# Altium PCB Copy of pcb_solder.PcbDoc (part 2 of 2)
Units mil, origin at the board's own origin, x right, y up, seen from the top; angles counter-clockwise.
Board outline 15000 x 4842.5 mil, 2 copper layers (F.Cu, B.Cu); 212 components, 120 nets, 804 pads, 0 vias.
Unrouted connection lines stored in the file: 258.
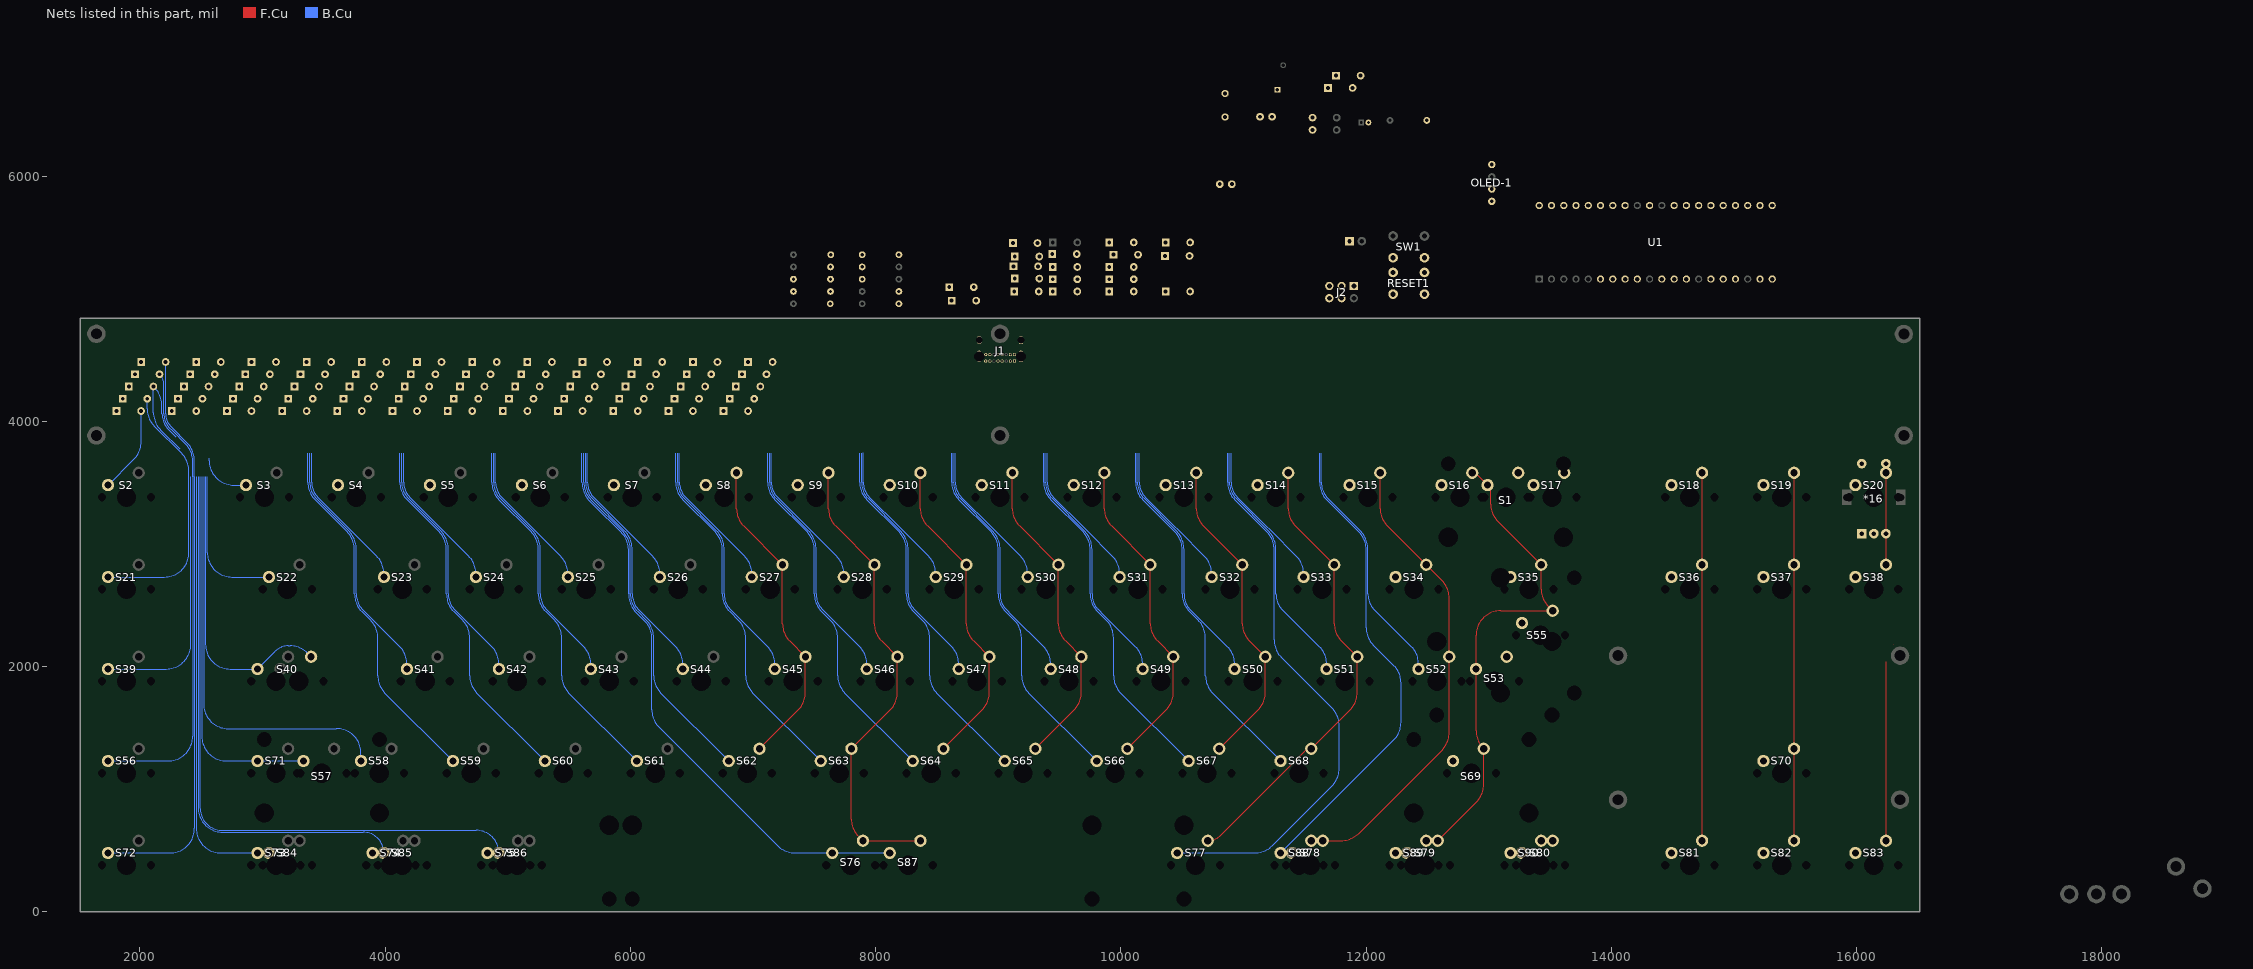
[diagram p2: the nets of this part, all layers, seen from the top]

## Nets (pads, with @x,y where several pads share a name; then routed paths per layer and width w, separated by ;. In a path a pad name is that pad's centre, name@x,y a point inside that pad or via, vN(x,y) a via of type N, cw(c..) or ccw(c..) an arc to the next point about the centre after c; other vN are vias at no path point) (continued)
COL6: S8.2 S27.2 S45.2 S62.2 U1.15 | length 2612.5
  F.Cu w10: S8.2@6865.25,3581 6865.25,3288.84 ccw(c7065.25,3288.84) 6923.83,3147.42 S27.2@7240.25,2831 7240.25,2351.34 ccw(c7440.25,2351.34) 7298.83,2209.92 S45.2@7427.75,2081 7427.75,1788.84 cw(c7227.75,1788.84) 7369.17,1647.42 S62.2@7052.75,1331
COL7: S9.2 S28.2 S46.2 S63.2 S76.2 S87.2 U1.19 | length 3861.5
  F.Cu w10: S9.2@7615.25,3581 7615.25,3288.84 ccw(c7815.25,3288.84) 7673.83,3147.42 S28.2@7990.25,2831 7990.25,2351.34 ccw(c8190.25,2351.34) 8048.83,2209.92 S46.2@8177.75,2081 8177.75,1788.84 cw(c7977.75,1788.84) 8119.17,1647.42 S63.2@7802.75,1331 7802.75,757.59 ccw(c8002.75,757.59) 7861.33,616.17 S76.2@7896.5,581 S87.2@8365.25,581
COL8: S10.2 S29.2 S47.2 S64.2 U1.20 | length 2612.5
  F.Cu w10: S10.2@8365.25,3581 8365.25,3288.84 ccw(c8565.25,3288.84) 8423.83,3147.42 S29.2@8740.25,2831 8740.25,2351.34 ccw(c8940.25,2351.34) 8798.83,2209.92 S47.2@8927.75,2081 8927.75,1788.84 cw(c8727.75,1788.84) 8869.17,1647.42 S64.2@8552.75,1331
COL9: S11.2 S30.2 S48.2 S65.2 U1.35 | length 2612.5
  F.Cu w10: S11.2@9115.25,3581 9115.25,3288.84 ccw(c9315.25,3288.84) 9173.83,3147.42 S30.2@9490.25,2831 9490.25,2351.34 ccw(c9690.25,2351.34) 9548.83,2209.92 S48.2@9677.75,2081 9677.75,1788.84 cw(c9477.75,1788.84) 9619.17,1647.42 S65.2@9302.75,1331
COL10: S12.2 S31.2 S49.2 S66.2 U1.34 | length 2612.5
  F.Cu w10: S12.2@9865.25,3581 9865.25,3288.84 ccw(c10065.25,3288.84) 9923.83,3147.42 S31.2@10240.25,2831 10240.25,2351.34 ccw(c10440.25,2351.34) 10298.83,2209.92 S49.2@10427.75,2081 10427.75,1788.84 cw(c10227.75,1788.84) 10369.17,1647.42 S66.2@10052.75,1331
COL11: S13.2 S32.2 S50.2 S67.2 U1.33 | length 2612.5
  F.Cu w10: S13.2@10615.25,3581 10615.25,3288.84 ccw(c10815.25,3288.84) 10673.83,3147.42 S32.2@10990.25,2831 10990.25,2351.34 ccw(c11190.25,2351.34) 11048.83,2209.92 S50.2@11177.75,2081 11177.75,1788.84 cw(c10977.75,1788.84) 11119.17,1647.42 S67.2@10802.75,1331
COL12: S14.2 S33.2 S51.2 S68.2 S77.2 U1.29 | length 3757.2
  F.Cu w10: S77.2@10709,581 ccw(c10709,733.1) 10816.55,625.55 11500.26,1309.26 cw(c11552.75,1256.76) S68.2@11552.75,1331 11869.17,1647.42 ccw(c11727.75,1788.84) 11927.75,1788.84 S51.2@11927.75,2081 11798.83,2209.92 cw(c11940.25,2351.34) 11740.25,2351.34 S33.2@11740.25,2831 11423.83,3147.42 cw(c11565.25,3288.84) 11365.25,3288.84 S14.2@11365.25,3581
COL13: S15.2 S34.2 S52.2 S78.2 S88.2 U1.28 | length 3856.3
  F.Cu w10: S88.2@11552.75,581 S78.2@11646.5,581 11797.16,581 ccw(c11797.16,781) 11938.58,639.58 12619.17,1320.17 ccw(c12477.75,1461.59) 12677.75,1461.59 S52.2@12677.75,2081 12677.75,2560.66 ccw(c12477.75,2560.66) 12619.17,2702.08 S34.2@12490.25,2831 12173.83,3147.42 cw(c12315.25,3288.84) 12115.25,3288.84 S15.2@12115.25,3581
COL14: S1.2 S16.2 S35.2 S53.2 S55.2 S69.2 S79.2 S89.2 U1.27 | length 3968
  F.Cu w10: S79.2@12584,581 12900.42,897.42 ccw(c12759,1038.84) 12959,1038.84 S69.2@12959,1331 12955.08,1334.92 cw(c13096.5,1476.34) 12896.5,1476.34 S53.2@12896.5,1981 12896.5,2256 cw(c13096.5,2256) 13096.5,2456 S55.2@13521.5,2456 13486.33,2491.17 cw(c13627.75,2632.59) 13427.75,2632.59 S35.2@13427.75,2831 13074.58,3184.17 cw(c13216,3325.59) 13016,3325.59 13016,3438 ccw(c12974.35,3438) 13003.8,3467.45 S1.2@12990.25,3481 12907.93,3563.32 ccw(c12865.25,3520.64) S16.2@12865.25,3581
COL15: S17.2 S80.2 S90.2 U1.26
COL16: J2.1 S18.2 S36.2 S81.2 U1.7 | length 3000
  F.Cu w10: S81.2@14740.25,581 S36.2@14740.25,2831 S18.2@14740.25,3581
COL17: J2.4 S19.2 S37.2 S70.2 S82.2 U1.6 | length 3000
  F.Cu w10: S82.2@15490.25,581 S70.2@15490.25,1331 S37.2@15490.25,2831 S19.2@15490.25,3581
COL18: *16.S1 S20.2 S38.2 S83.2 U1.21 | length 2207.6
  F.Cu w10: S83.2@16240.25,581 16240.25,2038.41 ; S38.2@16240.25,2831 S20.2@16240.25,3581 ; 16298.83,2179.83 16299,2180
D+: J1.A6 J1.B6 R7.1 R7.2 U1.16 ZD2.1
D-: J1.A7 J1.B7 R5.2 R6.1 R6.2 U1.17 ZD1.1
ENCA: *16.A R10.2 U1.24
ENCB: *16.B R9.2 U1.25
ENCSW2: *16.S2 D19.2 S20.1
GND: *16.C C1.2 C2.2 C3.2 C4.2 C5.2 J1.1 J1.2 J1.3 J1.4 J1.A1 J1.A12 J1.B1 J1.B12 J2.6 OLED-1.4 R1.1 R4.2 R8.1 RESET1.2 SW1.2 U1.11 U1.31 ZD1.2 ZD2.2
i2c_SCL: OLED-1.2 R3.1 U1.22
i2c_SDA: OLED-1.1 R2.1 U1.23
NetC1_1: C1.1 U1.13 Y1.1
NetC2_1: C2.1 U1.12 Y1.2
NetD1_2: D1.2 S2.1 | length 707.1
  B.Cu w10: S2.1@1740.25,3481 1951.42,3692.17 ccw(c1810,3833.59) 2010,3833.59 D1.2@2010,4085
NetD2_2: D2.2 S3.1 | length 433.4
  B.Cu w10: 2565,3700 2565,3681 ccw(c2765,3681) 2765,3481 S3.1@2865.25,3481
NetD3_2: D3.2 S4.1
NetD4_2: D4.2 S5.1
NetD5_2: D5.2 S6.1
NetD6_2: D6.2 S7.1
NetD7_2: D7.2 S8.1
NetD8_2: D8.2 S9.1
NetD9_2: D9.2 S10.1
NetD10_2: D10.2 S11.1
NetD11_2: D11.2 S12.1
NetD12_2: D12.2 S13.1
NetD13_2: D13.2 S14.1
NetD14_2: D14.2 S15.1
NetD15_2: D15.2 S1.1 S16.1
NetD16_2: D16.2 S17.1
NetD17_2: D17.2 S18.1
NetD18_2: D18.2 S19.1
NetD20_2: D20.2 S21.1 | length 2151.5
  B.Cu w10: S21.1@1740.25,2731 2200,2731 ccw(c2200,2931) 2400,2931 2400,3597.16 ccw(c2200,3597.16) 2341.42,3738.58 2118.58,3961.42 cw(c2260,4102.84) 2060,4102.84 D20.2@2060,4185
NetD21_2: D21.2 S22.1 | length 1235.9
  B.Cu w10: 2550,3550 2550,2931 ccw(c2750,2931) 2750,2731 S22.1@3052.75,2731
NetD22_2: D22.2 S23.1 | length 1237.4
  B.Cu w10: 3400,3740 3400,3502.84 ccw(c3570,3502.84) 3449.83,3382.6 3687.21,3145.21 3712.58,3119.85 cw(c3550,2957.16) 3720.62,3111.39 ccw(c3728,3118.14) 3720.88,3111.12 3931.67,2900.33 cw(c3790.25,2758.91) 3990.25,2758.91 S23.1@3990.25,2731
NetD23_2: D23.2 S24.1 | length 1237.4
  B.Cu w10: 4150,3740 4150,3502.84 ccw(c4320,3502.84) 4199.83,3382.6 4437.21,3145.21 4462.58,3119.85 cw(c4300,2957.16) 4470.62,3111.39 ccw(c4478,3118.14) 4470.88,3111.12 4681.67,2900.33 cw(c4540.25,2758.91) 4740.25,2758.91 S24.1@4740.25,2731
NetD24_2: D24.2 S25.1 | length 1237.4
  B.Cu w10: 4900,3740 4900,3502.84 ccw(c5070,3502.84) 4949.83,3382.6 5187.21,3145.21 5212.58,3119.85 cw(c5050,2957.16) 5220.62,3111.39 ccw(c5228,3118.14) 5220.88,3111.12 5431.67,2900.33 cw(c5290.25,2758.91) 5490.25,2758.91 S25.1@5490.25,2731
NetD25_2: D25.2 S26.1 | length 1237.4
  B.Cu w10: 5650,3740 5650,3502.84 ccw(c5820,3502.84) 5699.83,3382.6 5937.21,3145.21 5962.58,3119.85 cw(c5800,2957.16) 5970.62,3111.39 ccw(c5978,3118.14) 5970.88,3111.12 6181.67,2900.33 cw(c6040.25,2758.91) 6240.25,2758.91 S26.1@6240.25,2731
NetD26_2: D26.2 S27.1 | length 1237.4
  B.Cu w10: 6400,3740 6400,3502.84 ccw(c6570,3502.84) 6449.83,3382.6 6687.21,3145.21 6712.58,3119.85 cw(c6550,2957.16) 6720.62,3111.39 ccw(c6728,3118.14) 6720.88,3111.12 6931.67,2900.33 cw(c6790.25,2758.91) 6990.25,2758.91 S27.1@6990.25,2731
NetD27_2: D27.2 S28.1 | length 1237.4
  B.Cu w10: 7150,3740 7150,3502.84 ccw(c7320,3502.84) 7199.83,3382.6 7437.21,3145.21 7462.58,3119.85 cw(c7300,2957.16) 7470.62,3111.39 ccw(c7478,3118.14) 7470.88,3111.12 7681.67,2900.33 cw(c7540.25,2758.91) 7740.25,2758.91 S28.1@7740.25,2731
NetD28_2: D28.2 S29.1 | length 1240.3
  B.Cu w10: 7900,3742.84 7900,3502.84 ccw(c8070,3502.84) 7949.83,3382.6 7949.89,3382.54 8187.21,3145.21 8212.58,3119.85 cw(c8050,2957.16) 8220.62,3111.39 ccw(c8228,3118.14) 8220.88,3111.12 8431.67,2900.33 cw(c8290.25,2758.91) 8490.25,2758.91 S29.1@8490.25,2731
NetD29_2: D29.2 S30.1 | length 1237.4
  B.Cu w10: 8650,3740 8650,3502.84 ccw(c8820,3502.84) 8699.83,3382.6 8937.21,3145.21 8962.58,3119.85 cw(c8800,2957.16) 8970.62,3111.39 ccw(c8978,3118.14) 8970.88,3111.12 9181.67,2900.33 cw(c9040.25,2758.91) 9240.25,2758.91 S30.1@9240.25,2731
NetD30_2: D30.2 S31.1 | length 1237.4
  B.Cu w10: 9400,3740 9400,3502.84 ccw(c9570,3502.84) 9449.83,3382.6 9687.21,3145.21 9712.58,3119.85 cw(c9550,2957.16) 9720.62,3111.39 ccw(c9728,3118.14) 9720.88,3111.12 9931.67,2900.33 cw(c9790.25,2758.91) 9990.25,2758.91 S31.1@9990.25,2731
NetD31_2: D31.2 S32.1 | length 1237.4
  B.Cu w10: 10150,3740 10150,3502.84 ccw(c10320,3502.84) 10199.83,3382.6 10437.21,3145.21 10462.58,3119.85 cw(c10300,2957.16) 10470.62,3111.39 ccw(c10478,3118.14) 10470.88,3111.12 10681.67,2900.33 cw(c10540.25,2758.91) 10740.25,2758.91 S32.1@10740.25,2731
NetD32_2: D32.2 S33.1 | length 1237.4
  B.Cu w10: 10900,3740 10900,3502.84 ccw(c11070,3502.84) 10949.83,3382.6 11187.21,3145.21 11212.58,3119.85 cw(c11050,2957.16) 11220.62,3111.39 ccw(c11228,3118.14) 11220.88,3111.12 11431.67,2900.33 cw(c11290.25,2758.91) 11490.25,2758.91 S33.1@11490.25,2731
NetD33_2: D33.2 S34.1
NetD34_2: D34.2 S35.1
NetD35_2: D35.2 S36.1
NetD36_2: D36.2 S37.1
NetD37_2: D37.2 S38.1
NetD38_2: D38.2 S39.1 | length 3212.1
  B.Cu w10: S39.1@1740.25,1981 2215,1981 ccw(c2215,2181) 2415,2181 2415,3550 ; 2291.29,3876.29 2247.77,3919.8 ccw(c2240.67,3912.77) 2247.69,3919.88 2233.85,3933.72 cw(c2363.64,4063.64) 2180,4063.64 2180,4074.74 cw(c2348.99,4075) 2180,4075 2180,4132.16 ccw(c1980,4132.16) 2121.42,4273.58 D38.2@2110,4285 2110,4072.84 ccw(c2310,4072.84) 2155.84,3945.42 ccw(c2163.5,3951.85) 2156.39,3944.82 2175.61,3925.61 2323.11,3778.11
NetD39_2: D39.2 S40.1 | length 2444.8
  B.Cu w10: 2535,3550 2535,2181 ccw(c2735,2181) 2735,1981 S40.1@2959,1981 3104.16,2126.16 cw(c3210,2020.32) 3210,2170 3224.66,2170 cw(c3224.66,1970) 3366.08,2111.42 S40.1@3396.5,2081
NetD40_2: D40.2 S41.1 | length 2053.8
  B.Cu w10: 3385,3740 3385,3502.84 ccw(c3570,3502.84) 3439.18,3372.03 3702.01,3109.2 cw(c3550,2957.16) 3733.8,3068.7 cw(c3550,2957.16) 3765,2957.16 3765,2592.84 ccw(c3950,2592.84) 3765.18,2584.63 ccw(c3950,2592.84) 3809.22,2472.82 ccw(c3816.79,2479.35) 3809.68,2472.32 3862,2420 4119.17,2162.83 cw(c3977.75,2021.41) 4177.75,2021.41 S41.1@4177.75,1981
NetD41_2: D41.2 S42.1 | length 2053.8
  B.Cu w10: 4135,3740 4135,3502.84 ccw(c4320,3502.84) 4189.18,3372.03 4452.01,3109.2 cw(c4300,2957.16) 4483.8,3068.7 cw(c4300,2957.16) 4515,2957.16 4515,2592.84 ccw(c4700,2592.84) 4515.18,2584.63 ccw(c4700,2592.84) 4559.22,2472.82 ccw(c4566.79,2479.35) 4559.68,2472.32 4612,2420 4869.17,2162.83 cw(c4727.75,2021.41) 4927.75,2021.41 S42.1@4927.75,1981
NetD42_2: D42.2 S43.1 | length 2053.8
  B.Cu w10: 4885,3740 4885,3502.84 ccw(c5070,3502.84) 4939.18,3372.03 5202.01,3109.2 cw(c5050,2957.16) 5233.8,3068.7 cw(c5050,2957.16) 5265,2957.16 5265,2592.84 ccw(c5450,2592.84) 5265.18,2584.63 ccw(c5450,2592.84) 5309.22,2472.82 ccw(c5316.79,2479.35) 5309.68,2472.32 5362,2420 5619.17,2162.83 cw(c5477.75,2021.41) 5677.75,2021.41 S43.1@5677.75,1981
NetD43_2: D43.2 S44.1 | length 2053.8
  B.Cu w10: 5635,3740 5635,3502.84 ccw(c5820,3502.84) 5689.18,3372.03 5952.01,3109.2 cw(c5800,2957.16) 5983.8,3068.7 cw(c5800,2957.16) 6015,2957.16 6015,2592.84 ccw(c6200,2592.84) 6015.18,2584.63 ccw(c6200,2592.84) 6059.22,2472.82 ccw(c6066.79,2479.35) 6059.68,2472.32 6112,2420 6369.17,2162.83 cw(c6227.75,2021.41) 6427.75,2021.41 S44.1@6427.75,1981
NetD44_2: D44.2 S45.1 | length 2053.8
  B.Cu w10: 6385,3740 6385,3502.84 ccw(c6570,3502.84) 6439.18,3372.03 6702.01,3109.2 cw(c6550,2957.16) 6733.8,3068.7 cw(c6550,2957.16) 6765,2957.16 6765,2592.84 ccw(c6950,2592.84) 6765.18,2584.63 ccw(c6950,2592.84) 6809.22,2472.82 ccw(c6816.79,2479.35) 6809.68,2472.32 6862,2420 7119.17,2162.83 cw(c6977.75,2021.41) 7177.75,2021.41 S45.1@7177.75,1981
NetD45_2: D45.2 S46.1 | length 2053.8
  B.Cu w10: 7135,3740 7135,3502.84 ccw(c7320,3502.84) 7189.18,3372.03 7452.01,3109.2 cw(c7300,2957.16) 7483.8,3068.7 cw(c7300,2957.16) 7515,2957.16 7515,2592.84 ccw(c7700,2592.84) 7515.18,2584.63 ccw(c7700,2592.84) 7559.22,2472.82 ccw(c7566.79,2479.35) 7559.68,2472.32 7612,2420 7869.17,2162.83 cw(c7727.75,2021.41) 7927.75,2021.41 S46.1@7927.75,1981
NetD46_2: D46.2 S47.1 | length 2053.8
  B.Cu w10: 7885,3740 7885,3502.84 ccw(c8070,3502.84) 7939.18,3372.03 8202.01,3109.2 cw(c8050,2957.16) 8233.8,3068.7 cw(c8050,2957.16) 8265,2957.16 8265,2592.84 ccw(c8450,2592.84) 8265.18,2584.63 ccw(c8450,2592.84) 8309.22,2472.82 ccw(c8316.79,2479.35) 8309.68,2472.32 8362,2420 8619.17,2162.83 cw(c8477.75,2021.41) 8677.75,2021.41 S47.1@8677.75,1981
NetD47_2: D47.2 S48.1 | length 2053.8
  B.Cu w10: 8635,3740 8635,3502.84 ccw(c8820,3502.84) 8689.18,3372.03 8952.01,3109.2 cw(c8800,2957.16) 8983.8,3068.7 cw(c8800,2957.16) 9015,2957.16 9015,2592.84 ccw(c9200,2592.84) 9015.18,2584.63 ccw(c9200,2592.84) 9059.22,2472.82 ccw(c9066.79,2479.35) 9059.68,2472.32 9112,2420 9369.17,2162.83 cw(c9227.75,2021.41) 9427.75,2021.41 S48.1@9427.75,1981
NetD48_2: D48.2 S49.1 | length 2053.8
  B.Cu w10: 9385,3740 9385,3502.84 ccw(c9570,3502.84) 9439.18,3372.03 9702.01,3109.2 cw(c9550,2957.16) 9733.8,3068.7 cw(c9550,2957.16) 9765,2957.16 9765,2592.84 ccw(c9950,2592.84) 9765.18,2584.63 ccw(c9950,2592.84) 9809.22,2472.82 ccw(c9816.79,2479.35) 9809.68,2472.32 9862,2420 10119.17,2162.83 cw(c9977.75,2021.41) 10177.75,2021.41 S49.1@10177.75,1981
NetD49_2: D49.2 S50.1 | length 2053.8
  B.Cu w10: 10135,3740 10135,3502.84 ccw(c10320,3502.84) 10189.18,3372.03 10452.01,3109.2 cw(c10300,2957.16) 10483.8,3068.7 cw(c10300,2957.16) 10515,2957.16 10515,2592.84 ccw(c10700,2592.84) 10515.18,2584.63 ccw(c10700,2592.84) 10559.22,2472.82 ccw(c10566.79,2479.35) 10559.68,2472.32 10612,2420 10869.17,2162.83 cw(c10727.75,2021.41) 10927.75,2021.41 S50.1@10927.75,1981
NetD50_2: D50.2 S51.1 | length 2053.8
  B.Cu w10: 10885,3740 10885,3502.84 ccw(c11070,3502.84) 10939.18,3372.03 11202.01,3109.2 cw(c11050,2957.16) 11233.8,3068.7 cw(c11050,2957.16) 11265,2957.16 11265,2592.84 ccw(c11450,2592.84) 11265.18,2584.63 ccw(c11450,2592.84) 11309.22,2472.82 ccw(c11316.79,2479.35) 11309.68,2472.32 11362,2420 11619.17,2162.83 cw(c11477.75,2021.41) 11677.75,2021.41 S51.1@11677.75,1981
NetD51_2: D51.2 S52.1 | length 2053.8
  B.Cu w10: 11635,3740 11635,3502.84 ccw(c11820,3502.84) 11689.18,3372.03 11952.01,3109.2 cw(c11800,2957.16) 11983.8,3068.7 cw(c11800,2957.16) 12015,2957.16 12015,2592.84 ccw(c12200,2592.84) 12015.18,2584.63 ccw(c12200,2592.84) 12059.22,2472.82 ccw(c12066.79,2479.35) 12059.68,2472.32 12112,2420 12369.17,2162.83 cw(c12227.75,2021.41) 12427.75,2021.41 S52.1@12427.75,1981
NetD52_2: D52.2 S53.1 S55.1
NetD53_2: D53.2 S56.1 | length 3849.4
  B.Cu w10: S56.1@1740.25,1231 2230,1231 ccw(c2230,1431) 2430,1431 2430,3550 2430,3682.16 ccw(c2245,3682.16) 2375.81,3812.97 2258.41,3930.38 ccw(c2251.3,3923.34) 2258.37,3930.41 2244.47,3944.31 cw(c2363.64,4063.64) 2195,4063.64 2195,4300.5 ccw(c2075.5,4300.5) D53.2@2160,4385
NetD54_2: D54.2 S57.1 S71.1 | length 3062.2
  B.Cu w10: 2505,3550 2505,1431 ccw(c2705,1431) 2705,1231 S71.1@2959,1231 S57.1@3334,1231
NetD55_2: D55.2 S58.1 | length 3430.1
  B.Cu w10: 2520,3550 2520,1695 ccw(c2720,1695) 2720,1495 3602.75,1495 cw(c3602.75,1295) 3802.75,1295 S58.1@3802.75,1231
NetD56_2: D56.2 S59.1 | length 2955.9
  B.Cu w10: 3370,3740 3370,3502.84 ccw(c3570,3502.84) 3428.58,3361.42 3691.42,3098.58 cw(c3550,2957.16) 3750,2957.16 3750,2592.84 ccw(c3950,2592.84) 3808.58,2451.42 3881.42,2378.58 cw(c3740,2237.16) 3940,2237.16 3940,1926.59 ccw(c4140,1926.59) 3998.58,1785.17 S59.1@4552.75,1231
NetD57_2: D57.2 S60.1 | length 2955.9
  B.Cu w10: 4120,3740 4120,3502.84 ccw(c4320,3502.84) 4178.58,3361.42 4441.42,3098.58 cw(c4300,2957.16) 4500,2957.16 4500,2592.84 ccw(c4700,2592.84) 4558.58,2451.42 4631.42,2378.58 cw(c4490,2237.16) 4690,2237.16 4690,1926.59 ccw(c4890,1926.59) 4748.58,1785.17 S60.1@5302.75,1231
NetD58_2: D58.2 S61.1 | length 2955.9
  B.Cu w10: 4870,3740 4870,3502.84 ccw(c5070,3502.84) 4928.58,3361.42 5191.42,3098.58 cw(c5050,2957.16) 5250,2957.16 5250,2592.84 ccw(c5450,2592.84) 5308.58,2451.42 5381.42,2378.58 cw(c5240,2237.16) 5440,2237.16 5440,1926.59 ccw(c5640,1926.59) 5498.58,1785.17 S61.1@6052.75,1231
NetD59_2: D59.2 S62.1 | length 2955.9
  B.Cu w10: 5620,3740 5620,3502.84 ccw(c5820,3502.84) 5678.58,3361.42 5941.42,3098.58 cw(c5800,2957.16) 6000,2957.16 6000,2592.84 ccw(c6200,2592.84) 6058.58,2451.42 6131.42,2378.58 cw(c5990,2237.16) 6190,2237.16 6190,1926.59 ccw(c6390,1926.59) 6248.58,1785.17 S62.1@6802.75,1231
NetD60_2: D60.2 S63.1 | length 2955.9
  B.Cu w10: 6370,3740 6370,3502.84 ccw(c6570,3502.84) 6428.58,3361.42 6691.42,3098.58 cw(c6550,2957.16) 6750,2957.16 6750,2592.84 ccw(c6950,2592.84) 6808.58,2451.42 6881.42,2378.58 cw(c6740,2237.16) 6940,2237.16 6940,1926.59 ccw(c7140,1926.59) 6998.58,1785.17 S63.1@7552.75,1231
NetD61_2: D61.2 S64.1 | length 2955.9
  B.Cu w10: 7120,3740 7120,3502.84 ccw(c7320,3502.84) 7178.58,3361.42 7441.42,3098.58 cw(c7300,2957.16) 7500,2957.16 7500,2592.84 ccw(c7700,2592.84) 7558.58,2451.42 7631.42,2378.58 cw(c7490,2237.16) 7690,2237.16 7690,1926.59 ccw(c7890,1926.59) 7748.58,1785.17 S64.1@8302.75,1231
NetD62_2: D62.2 S65.1 | length 2955.9
  B.Cu w10: 7870,3740 7870,3502.84 ccw(c8070,3502.84) 7928.58,3361.42 8191.42,3098.58 cw(c8050,2957.16) 8250,2957.16 8250,2592.84 ccw(c8450,2592.84) 8308.58,2451.42 8381.42,2378.58 cw(c8240,2237.16) 8440,2237.16 8440,1926.59 ccw(c8640,1926.59) 8498.58,1785.17 S65.1@9052.75,1231
NetD63_2: D63.2 S66.1 | length 2955.9
  B.Cu w10: 8620,3740 8620,3502.84 ccw(c8820,3502.84) 8678.58,3361.42 8941.42,3098.58 cw(c8800,2957.16) 9000,2957.16 9000,2592.84 ccw(c9200,2592.84) 9058.58,2451.42 9131.42,2378.58 cw(c8990,2237.16) 9190,2237.16 9190,1926.59 ccw(c9390,1926.59) 9248.58,1785.17 S66.1@9802.75,1231
NetD64_2: D64.2 S67.1 | length 2955.9
  B.Cu w10: 9370,3740 9370,3502.84 ccw(c9570,3502.84) 9428.58,3361.42 9691.42,3098.58 cw(c9550,2957.16) 9750,2957.16 9750,2592.84 ccw(c9950,2592.84) 9808.58,2451.42 9881.42,2378.58 cw(c9740,2237.16) 9940,2237.16 9940,1926.59 ccw(c10140,1926.59) 9998.58,1785.17 S67.1@10552.75,1231
NetD65_2: D65.2 S68.1 | length 2955.9
  B.Cu w10: 10120,3740 10120,3502.84 ccw(c10320,3502.84) 10178.58,3361.42 10441.42,3098.58 cw(c10300,2957.16) 10500,2957.16 10500,2592.84 ccw(c10700,2592.84) 10558.58,2451.42 10631.42,2378.58 cw(c10490,2237.16) 10690,2237.16 10690,1926.59 ccw(c10890,1926.59) 10748.58,1785.17 S68.1@11302.75,1231
NetD66_2: D66.2 S69.1
NetD67_2: D67.2 S70.1
NetD69_2: D69.2 S72.1 | length 4705
  B.Cu w10: S72.1@1740.25,481 2245,481 ccw(c2245,681) 2445,681 2445,3550 2445,3682.16 ccw(c2245,3682.16) 2386.42,3823.58 2255,3955 cw(c2363.64,4063.64) 2210,4063.64 D69.2@2210,4485
NetD70_2: D70.2 S73.1 S84.1 | length 3575.9
  B.Cu w10: 2460,3550 2460,681 ccw(c2660,681) 2660,481 S73.1@2959,481 S84.1@3052.75,481
NetD71_2: D71.2 S74.1 S85.1 | length 4425.9
  B.Cu w10: 2475,3550 2475,850 ccw(c2675,850) 2675,650 3821.25,650 cw(c3821.25,481) S85.1@3990.25,481
NetD72_2: D72.2 S75.1 S86.1 | length 5348.4
  B.Cu w10: 2490,3550 2490,850 ccw(c2675,850) 2675,665 4743.75,665 cw(c4743.75,481) S86.1@4927.75,481
NetD73_2: D73.2 S76.1 S87.1 | length 4748.5
  B.Cu w10: 5605,3740 5605,3502.84 ccw(c5820,3502.84) 5668.05,3350.73 5697.51,3321.28 cw(c5690.43,3314.21) 5697.58,3321.21 5923.89,3094.89 5930.74,3088.05 cw(c5800,2957.16) 5985,2957.16 5985,2592.84 ccw(c6200,2592.84) 6048.05,2440.73 6067.3,2421.49 cw(c6060.23,2414.42) 6067.38,2421.41 6069.89,2418.89 6120.76,2368.02 cw(c5990,2237.16) 6149.42,2331.03 cw(c6140.78,2325.99) 6149.48,2330.92 cw(c5975,2233.16) 6175,2233.16 6175,1647.84 ccw(c6375,1647.84) 6233.58,1506.42 7200.42,539.58 ccw(c7341.84,681) 7341.84,481 S76.1@7646.5,481 S87.1@8115.25,481
NetD74_2: D74.2 S77.1 | length 4551.9
  B.Cu w10: S77.1@10459,481 11093.16,481 ccw(c11093.16,681) 11234.58,539.58 11721.42,1026.42 ccw(c11580,1167.84) 11780,1167.84 11780,1522.16 ccw(c11580,1522.16) 11721.42,1663.58 11307.58,2077.42 cw(c11449,2218.84) 11249,2218.84 11249,2969.16 ccw(c11049,2969.16) 11248.73,2979.5 ccw(c11238.75,2978.93) 11248.69,2980.03 ccw(c11050,2957.16) 11191.33,3098.67 11105.5,3184.5 10928.6,3361.4 ccw(c10921.53,3354.33) 10928.54,3361.46 10928.43,3361.57 cw(c11070,3502.84) 10870,3502.84 10870,3740
NetD75_2: D75.2 S78.1 S88.1 | length 3992
  B.Cu w10: S78.1@11396.5,481 S88.1@11302.75,481 12226.42,1404.67 ccw(c12085,1546.09) 12285,1546.09 12285,1867.16 ccw(c12085,1867.16) 12226.42,2008.58 12058.58,2176.42 cw(c12200,2317.84) 12000,2317.84 12000,2957.16 ccw(c11800,2957.16) 11941.33,3098.67 11932.5,3107.5 11688.5,3351.5 ccw(c11681.35,3344.51) 11688.42,3351.58 11678.62,3361.38 ccw(c11671.53,3354.33) 11678.54,3361.46 11678.43,3361.57 cw(c11820,3502.84) 11620,3502.84 11620,3740
NetD76_2: D76.2 S79.1 S89.1
NetD77_2: D77.2 S80.1 S90.1
NetD78_2: D78.2 S81.1
NetD79_2: D79.2 S82.1
NetD80_2: D80.2 S83.1
NetLED1_1: LED1.1 R8.2
RESET: J2.5 R11.2 RESET1.1 U1.9
ROW0: D1.1 D2.1 D3.1 D4.1 D5.1 D6.1 D7.1 D8.1 D9.1 D10.1 D11.1 D12.1 D13.1 D14.1 D15.1 D16.1 D17.1 D18.1 D19.1 U1.40
ROW1: D20.1 D21.1 D22.1 D23.1 D24.1 D25.1 D26.1 D27.1 D28.1 D29.1 D30.1 D31.1 D32.1 D33.1 D34.1 D35.1 D36.1 D37.1 U1.39
ROW2: D38.1 D39.1 D40.1 D41.1 D42.1 D43.1 D44.1 D45.1 D46.1 D47.1 D48.1 D49.1 D50.1 D51.1 D52.1 U1.38
ROW3: D53.1 D54.1 D55.1 D56.1 D57.1 D58.1 D59.1 D60.1 D61.1 D62.1 D63.1 D64.1 D65.1 D66.1 D67.1 U1.37
ROW4: D69.1 D70.1 D71.1 D72.1 D73.1 D74.1 D75.1 D76.1 D77.1 D78.1 D79.1 D80.1 U1.36
SCK: J2.3 U1.8
VBUS: F1.1 J1.A4 J1.A9 J1.B4 J1.B9
pads on no net: "*1.M2 Hole" "*2.M2 Hole" "*3.M2 Hole" "*4.M2 Hole" "*5.M2 Hole" "*6.M2 Hole" "*7.M2 Hole" "*8.M2 Hole" "*9.M2 Hole" "*10.M2 Hole" "*11.M2 Hole" "*12.M2 Hole" "*13.M2 Hole" "*14.M2 Hole" "*15.M2 Hole" *16.MP D68.1 D68.2 J1.A8 J1.B8 S1. S2. S3. S4. S5. S6. S7. S8. S9. S10. S11. S12. S13. S14. S15. S16. S17. S18. S19. S20. S21. S22. S23. S24. S25. S26. S27. S28. S29. S30. S31. S32. S33. S34. S35. S36. S37. S38. S39. S40. S41. S42. S43. S44. S45. S46. S47. S48. S49. S50. S51. S52. S53. S55. S56. S57. S58. S59. S60. S61. S62. S63. S64. S65. S66. S67. S68. S69. S70. S71. S72. S73. S74. S75. S76. S77. S78. S79. S80. S81. S82. S83. S84. S85. S86. S87. S88. S89. S90. U1.32

## Keep-outs
Edge.Cuts:
  lines w1.97: 1515,100 ccw(c1615,100) 1615,0 ; 1515,100 ccw(c1615,100) 1615,0 ; 1515,100 1515,3812.5 ; 1515,100 1515,3812.5 ; 1515,3812.5 1515,4742.5 ; 1515,3812.5 1515,4742.5 ; 1515,4742.5 cw(c1615,4742.5) 1615,4842.5 ; 1515,4742.5 cw(c1615,4742.5) 1615,4842.5 ; 1615,0 2450,0 ; 1615,0 2450,0 ; 1615,4842.5 2820,4842.5 1615,4842.5 ; 2450,0 13975,0 ; 2450,0 13975,0 ; 13975,0 16415,0 ; 13975,0 16415,0 ; 16415,0 ccw(c16415,100) 16515,100 ; 16415,0 ccw(c16415,100) 16515,100 ; 16415,4842.5 cw(c16415,4742.5) 16515,4742.5 ; 16415,4842.5 cw(c16415,4742.5) 16515,4742.5 ; 16415,4842.5 11455,4842.5 16415,4842.5 ; 16515,100 16515,3795 ; 16515,100 16515,3795 ; 16515,3795 16515,3965 ; 16515,3795 16515,3965 ; 16515,3965 16515,4742.5 ; 16515,3965 16515,4742.5 ; 2920,4842.5 5507.5,4842.5 2920,4842.5 ; 5457.5,4842.5 8225,4842.5 5457.5,4842.5 ; 8175,4842.5 11425,4842.5 8175,4842.5 ; 11640,4822.5 11670,4822.5 11640,4822.5

## Silkscreen, mask and mechanical layers (free items; w line width, h text height)
F.SilkS:
  text "3.6V ZENER DIODES" at 11640,6620 h20
  text "JLCJLCJLCJLC" at 8020,3930 h39.37
Drill Drawing:
  lines w0.5: 1601.69,3841.69 1688.31,3928.31 ; 1601.69,3928.31 1688.31,3841.69 ; 1601.69,4671.69 1688.31,4758.31 ; 1601.69,4758.31 1688.31,4671.69 ; 2705.19,590.94 2791.81,677.56 ; 2705.19,677.56 2791.81,590.94 ; 2820,4845 1615,4845 ccw(c1615,4745) 1515,4745 1515,3815 1515,102.5 ccw(c1615,102.5) 1615,2.5 2450,2.5 13975,2.5 16415,2.5 ccw(c16415,102.5) 16515,102.5 16515,3797.5 16515,3967.5 16515,4745 ccw(c16415,4745) 16415,4845 11455,4845 ; 2920,4845 5507.5,4845 ; 5457.5,4845 8225,4845 ; 5705.19,590.94 5791.81,677.56 ; 5705.19,677.56 5791.81,590.94 ; 8175,4845 11425,4845 ; 8971.69,3841.69 9058.31,3928.31 ; 8971.69,3928.31 9058.31,3841.69 ; 8971.69,4671.69 9058.31,4758.31 ; 8971.69,4758.31 9058.31,4671.69 ; 9441.19,337.19 9527.81,423.81 ; 9441.19,423.81 9527.81,337.19 ; 9455.2,591.44 9541.8,678.06 ; 9455.2,678.06 9541.8,591.44 ; 11640,4825 11670,4825 ; 14011.7,871.69 14098.3,958.31 ; 14011.7,958.31 14098.3,871.69 ; 14011.7,2046.69 14098.3,2133.31 ; 14011.7,2133.31 14098.3,2046.69 ; 16311.7,871.69 16398.3,958.31 ; 16311.7,958.31 16398.3,871.69 ; 16311.7,2046.69 16398.3,2133.31 ; 16311.7,2133.31 16398.3,2046.69 ; 16341.7,3841.69 16428.3,3928.31 ; 16341.7,3928.31 16428.3,3841.69 ; 16341.7,4669.19 16428.3,4755.81 ; 16341.7,4755.81 16428.3,4669.19
  lines w10: 1645,3885 16385,3885 ; 1645,4800 1645,3765 1645,4715 3200,4715 ; 3300,4715 5995,4715 ; 8815,4715 9015,4715 ; 9015,3885 9015,4715 ; 9380,4715 9015,4715 ; 13940,915 14196,915 14055,915 14055,1030 14055,730 ; 13960,2090 14214,2090 14055,2090 ; 14055,1968 14055,2090 ; 14055,2209 14055,2090 ; 14380,4715 16385,4715 ; 16241,915 16466,915 16355,915 ; 16276,2090 16437,2090 16355,2090 16355,2208 16355,2012 ; 16355,776 16355,915 ; 16355,1053 16355,915 ; 16385,3760 16385,4712.5 ; 16385,4690 16385,4815

## Text inside footprints (layer, text, board x,y; h text height)
*16: F.Fab "%R" at 16315.66,3481.06 h39.37 r90
C1: F.Fab "%R" at 11159.81,6469.65 h23.62
C2: F.Fab "%R" at 10831.38,5919.65 h23.62
D1: F.Fab "%R" at 1889.27,4064.53 h31.5; F.Fab "K" at 1740.97,4130.28 h39.37; Cmts.User "K" at 1740.97,4130.28 h39.37
D2: F.Fab "%R" at 2889.27,4264.53 h31.5; F.Fab "K" at 2740.97,4330.28 h39.37; Cmts.User "K" at 2740.97,4330.28 h39.37
D3: F.Fab "%R" at 3289.27,4164.53 h31.5; F.Fab "K" at 3140.97,4230.28 h39.37; Cmts.User "K" at 3140.97,4230.28 h39.37
D4: F.Fab "%R" at 3689.27,4064.53 h31.5; F.Fab "K" at 3540.97,4130.28 h39.37; Cmts.User "K" at 3540.97,4130.28 h39.37
D5: F.Fab "K" at 3740.97,4530.28 h39.37; F.Fab "%R" at 3889.27,4464.53 h31.5; Cmts.User "K" at 3740.97,4530.28 h39.37
D6: F.Fab "%R" at 4339.27,4464.53 h31.5; F.Fab "K" at 4190.97,4530.28 h39.37; Cmts.User "K" at 4190.97,4530.28 h39.37
D7: F.Fab "%R" at 4739.27,4364.53 h31.5; F.Fab "K" at 4590.97,4430.28 h39.37; Cmts.User "K" at 4590.97,4430.28 h39.37
D8: F.Fab "%R" at 5139.27,4264.53 h31.5; F.Fab "K" at 4990.97,4330.28 h39.37; Cmts.User "K" at 4990.97,4330.28 h39.37
D9: F.Fab "%R" at 5539.27,4164.53 h31.5; F.Fab "K" at 5390.97,4230.28 h39.37; Cmts.User "K" at 5390.97,4230.28 h39.37
D10: F.Fab "%R" at 5939.27,4064.53 h31.5; F.Fab "K" at 5790.97,4130.28 h39.37; Cmts.User "K" at 5790.97,4130.28 h39.37
D11: F.Fab "%R" at 6139.27,4464.53 h31.5; F.Fab "K" at 5990.97,4530.28 h39.37; Cmts.User "K" at 5990.97,4530.28 h39.37
D12: F.Fab "%R" at 6539.27,4364.53 h31.5; F.Fab "K" at 6390.97,4430.28 h39.37; Cmts.User "K" at 6390.97,4430.28 h39.37
D13: F.Fab "%R" at 6939.27,4264.53 h31.5; F.Fab "K" at 6790.97,4330.28 h39.37; Cmts.User "K" at 6790.97,4330.28 h39.37
D14: F.Fab "K" at 8530.97,5140.28 h39.37; F.Fab "%R" at 8679.27,5074.53 h31.5; Cmts.User "K" at 8530.97,5140.28 h39.37
D15: F.Fab "K" at 9835.97,5205.28 h39.37; F.Fab "%R" at 9984.27,5139.53 h31.5; Cmts.User "K" at 9835.97,5205.28 h39.37
D16: F.Fab "K" at 9375.97,5205.28 h39.37; F.Fab "%R" at 9524.27,5139.53 h31.5; Cmts.User "K" at 9375.97,5205.28 h39.37
D17: F.Fab "K" at 10295.97,5105.28 h39.37; F.Fab "%R" at 10444.27,5039.53 h31.5; Cmts.User "K" at 10295.97,5105.28 h39.37
D18: F.Fab "K" at 9835.97,5105.28 h39.37; F.Fab "%R" at 9984.27,5039.53 h31.5; Cmts.User "K" at 9835.97,5105.28 h39.37
D19: F.Fab "K" at 9375.97,5105.28 h39.37; F.Fab "%R" at 9524.27,5039.53 h31.5; Cmts.User "K" at 9375.97,5105.28 h39.37
D20: F.Fab "%R" at 1939.27,4164.53 h31.5; F.Fab "K" at 1790.97,4230.28 h39.37; Cmts.User "K" at 1790.97,4230.28 h39.37
D21: F.Fab "%R" at 2839.27,4164.53 h31.5; F.Fab "K" at 2690.97,4230.28 h39.37; Cmts.User "K" at 2690.97,4230.28 h39.37
D22: F.Fab "%R" at 3239.27,4064.53 h31.5; F.Fab "K" at 3090.97,4130.28 h39.37; Cmts.User "K" at 3090.97,4130.28 h39.37
D23: F.Fab "%R" at 3439.27,4464.53 h31.5; F.Fab "K" at 3290.97,4530.28 h39.37; Cmts.User "K" at 3290.97,4530.28 h39.37
D24: F.Fab "%R" at 3839.27,4364.53 h31.5; F.Fab "K" at 3690.97,4430.28 h39.37; Cmts.User "K" at 3690.97,4430.28 h39.37
D25: F.Fab "%R" at 4289.27,4364.53 h31.5; F.Fab "K" at 4140.97,4430.28 h39.37; Cmts.User "K" at 4140.97,4430.28 h39.37
D26: F.Fab "%R" at 4689.27,4264.53 h31.5; F.Fab "K" at 4540.97,4330.28 h39.37; Cmts.User "K" at 4540.97,4330.28 h39.37
D27: F.Fab "%R" at 5089.27,4164.53 h31.5; F.Fab "K" at 4940.97,4230.28 h39.37; Cmts.User "K" at 4940.97,4230.28 h39.37
D28: F.Fab "%R" at 5489.27,4064.53 h31.5; F.Fab "K" at 5340.97,4130.28 h39.37; Cmts.User "K" at 5340.97,4130.28 h39.37
D29: F.Fab "%R" at 5689.27,4464.53 h31.5; F.Fab "K" at 5540.97,4530.28 h39.37; Cmts.User "K" at 5540.97,4530.28 h39.37
D30: F.Fab "%R" at 6089.27,4364.53 h31.5; F.Fab "K" at 5940.97,4430.28 h39.37; Cmts.User "K" at 5940.97,4430.28 h39.37
D31: F.Fab "%R" at 6489.27,4264.53 h31.5; F.Fab "K" at 6340.97,4330.28 h39.37; Cmts.User "K" at 6340.97,4330.28 h39.37
D32: F.Fab "%R" at 6889.27,4164.53 h31.5; F.Fab "K" at 6740.97,4230.28 h39.37; Cmts.User "K" at 6740.97,4230.28 h39.37
D33: F.Fab "K" at 8550.97,5030.28 h39.37; F.Fab "%R" at 8699.27,4964.53 h31.5; Cmts.User "K" at 8550.97,5030.28 h39.37
D34: F.Fab "K" at 9835.97,5305.28 h39.37; F.Fab "%R" at 9984.27,5239.53 h31.5; Cmts.User "K" at 9835.97,5305.28 h39.37
D35: F.Fab "K" at 9375.97,5305.28 h39.37; F.Fab "%R" at 9524.27,5239.53 h31.5; Cmts.User "K" at 9375.97,5305.28 h39.37
D36: F.Fab "K" at 10290.97,5395.28 h39.37; F.Fab "%R" at 10439.27,5329.53 h31.5; Cmts.User "K" at 10290.97,5395.28 h39.37
D37: F.Fab "%R" at 10019.27,5339.53 h31.5; F.Fab "K" at 9870.97,5405.28 h39.37; Cmts.User "K" at 9870.97,5405.28 h39.37
D38: F.Fab "%R" at 1989.27,4264.53 h31.5; F.Fab "K" at 1840.97,4330.28 h39.37; Cmts.User "K" at 1840.97,4330.28 h39.37
D39: F.Fab "%R" at 2789.27,4064.53 h31.5; F.Fab "K" at 2640.97,4130.28 h39.37; Cmts.User "K" at 2640.97,4130.28 h39.37
D40: F.Fab "%R" at 2989.27,4464.53 h31.5; F.Fab "K" at 2840.97,4530.28 h39.37; Cmts.User "K" at 2840.97,4530.28 h39.37
D41: F.Fab "%R" at 3389.27,4364.53 h31.5; F.Fab "K" at 3240.97,4430.28 h39.37; Cmts.User "K" at 3240.97,4430.28 h39.37
D42: F.Fab "%R" at 3789.27,4264.53 h31.5; F.Fab "K" at 3640.97,4330.28 h39.37; Cmts.User "K" at 3640.97,4330.28 h39.37
D43: F.Fab "%R" at 4239.27,4264.53 h31.5; F.Fab "K" at 4090.97,4330.28 h39.37; Cmts.User "K" at 4090.97,4330.28 h39.37
D44: F.Fab "%R" at 4639.27,4164.53 h31.5; F.Fab "K" at 4490.97,4230.28 h39.37; Cmts.User "K" at 4490.97,4230.28 h39.37
D45: F.Fab "%R" at 5039.27,4064.53 h31.5; F.Fab "K" at 4890.97,4130.28 h39.37; Cmts.User "K" at 4890.97,4130.28 h39.37
D46: F.Fab "%R" at 5239.27,4464.53 h31.5; F.Fab "K" at 5090.97,4530.28 h39.37; Cmts.User "K" at 5090.97,4530.28 h39.37
D47: F.Fab "%R" at 5639.27,4364.53 h31.5; F.Fab "K" at 5490.97,4430.28 h39.37; Cmts.User "K" at 5490.97,4430.28 h39.37
D48: F.Fab "%R" at 6039.27,4264.53 h31.5; F.Fab "K" at 5890.97,4330.28 h39.37; Cmts.User "K" at 5890.97,4330.28 h39.37
D49: F.Fab "%R" at 6439.27,4164.53 h31.5; F.Fab "K" at 6290.97,4230.28 h39.37; Cmts.User "K" at 6290.97,4230.28 h39.37
D50: F.Fab "%R" at 6839.27,4064.53 h31.5; F.Fab "K" at 6690.97,4130.28 h39.37; Cmts.User "K" at 6690.97,4130.28 h39.37
D51: F.Fab "%R" at 7039.27,4464.53 h31.5; F.Fab "K" at 6890.97,4530.28 h39.37; Cmts.User "K" at 6890.97,4530.28 h39.37
D52: F.Fab "%R" at 9519.27,5344.53 h31.5; F.Fab "K" at 9370.97,5410.28 h39.37; Cmts.User "K" at 9370.97,5410.28 h39.37
D53: F.Fab "%R" at 2039.27,4364.53 h31.5; F.Fab "K" at 1890.97,4430.28 h39.37; Cmts.User "K" at 1890.97,4430.28 h39.37
D54: F.Fab "%R" at 2489.27,4364.53 h31.5; F.Fab "K" at 2340.97,4430.28 h39.37; Cmts.User "K" at 2340.97,4430.28 h39.37
D55: F.Fab "%R" at 2539.27,4464.53 h31.5; F.Fab "K" at 2390.97,4530.28 h39.37; Cmts.User "K" at 2390.97,4530.28 h39.37
D56: F.Fab "%R" at 2939.27,4364.53 h31.5; F.Fab "K" at 2790.97,4430.28 h39.37; Cmts.User "K" at 2790.97,4430.28 h39.37
D57: F.Fab "%R" at 3339.27,4264.53 h31.5; F.Fab "K" at 3190.97,4330.28 h39.37; Cmts.User "K" at 3190.97,4330.28 h39.37
D58: F.Fab "%R" at 3739.27,4164.53 h31.5; F.Fab "K" at 3590.97,4230.28 h39.37; Cmts.User "K" at 3590.97,4230.28 h39.37
D59: F.Fab "%R" at 4189.27,4164.53 h31.5; F.Fab "K" at 4040.97,4230.28 h39.37; Cmts.User "K" at 4040.97,4230.28 h39.37
D60: F.Fab "%R" at 4589.27,4064.53 h31.5; F.Fab "K" at 4440.97,4130.28 h39.37; Cmts.User "K" at 4440.97,4130.28 h39.37
D61: F.Fab "%R" at 4789.27,4464.53 h31.5; F.Fab "K" at 4640.97,4530.28 h39.37; Cmts.User "K" at 4640.97,4530.28 h39.37
D62: F.Fab "%R" at 5189.27,4364.53 h31.5; F.Fab "K" at 5040.97,4430.28 h39.37; Cmts.User "K" at 5040.97,4430.28 h39.37
D63: F.Fab "%R" at 5589.27,4264.53 h31.5; F.Fab "K" at 5440.97,4330.28 h39.37; Cmts.User "K" at 5440.97,4330.28 h39.37
D64: F.Fab "%R" at 5989.27,4164.53 h31.5; F.Fab "K" at 5840.97,4230.28 h39.37; Cmts.User "K" at 5840.97,4230.28 h39.37
D65: F.Fab "%R" at 6389.27,4064.53 h31.5; F.Fab "K" at 6240.97,4130.28 h39.37; Cmts.User "K" at 6240.97,4130.28 h39.37
D66: F.Fab "K" at 10295.97,5505.28 h39.37; F.Fab "%R" at 10444.27,5439.53 h31.5; Cmts.User "K" at 10295.97,5505.28 h39.37
D67: F.Fab "K" at 9835.97,5505.28 h39.37; F.Fab "%R" at 9984.27,5439.53 h31.5; Cmts.User "K" at 9835.97,5505.28 h39.37
D68: F.Fab "%R" at 9524.27,5439.53 h31.5; F.Fab "K" at 9375.97,5505.28 h39.37; Cmts.User "K" at 9375.97,5505.28 h39.37
D69: F.Fab "%R" at 2089.27,4464.53 h31.5; F.Fab "K" at 1940.97,4530.28 h39.37; Cmts.User "K" at 1940.97,4530.28 h39.37
D70: F.Fab "%R" at 2339.27,4064.53 h31.5; F.Fab "K" at 2190.97,4130.28 h39.37; Cmts.User "K" at 2190.97,4130.28 h39.37
D71: F.Fab "%R" at 2389.27,4164.53 h31.5; F.Fab "K" at 2240.97,4230.28 h39.37; Cmts.User "K" at 2240.97,4230.28 h39.37
D72: F.Fab "%R" at 2439.27,4264.53 h31.5; F.Fab "K" at 2290.97,4330.28 h39.37; Cmts.User "K" at 2290.97,4330.28 h39.37
D73: F.Fab "%R" at 4139.27,4064.53 h31.5; F.Fab "K" at 3990.97,4130.28 h39.37; Cmts.User "K" at 3990.97,4130.28 h39.37
D74: F.Fab "%R" at 6589.27,4464.53 h31.5; F.Fab "K" at 6440.97,4530.28 h39.37; Cmts.User "K" at 6440.97,4530.28 h39.37
D75: F.Fab "%R" at 6989.27,4364.53 h31.5; F.Fab "K" at 6840.97,4430.28 h39.37; Cmts.User "K" at 6840.97,4430.28 h39.37
D76: F.Fab "%R" at 9199.27,5434.53 h31.5; F.Fab "K" at 9050.97,5500.28 h39.37; Cmts.User "K" at 9050.97,5500.28 h39.37
D77: F.Fab "%R" at 9214.27,5324.53 h31.5; F.Fab "K" at 9065.97,5390.28 h39.37; Cmts.User "K" at 9065.97,5390.28 h39.37
D78: F.Fab "%R" at 9204.27,5244.53 h31.5; F.Fab "K" at 9055.97,5310.28 h39.37; Cmts.User "K" at 9055.97,5310.28 h39.37
D79: F.Fab "%R" at 9209.27,5039.53 h31.5; F.Fab "K" at 9060.97,5105.28 h39.37; Cmts.User "K" at 9060.97,5105.28 h39.37
D80: F.Fab "%R" at 9214.27,5144.53 h31.5; F.Fab "K" at 9065.97,5210.28 h39.37; Cmts.User "K" at 9065.97,5210.28 h39.37
J2: F.SilkS "GND" at 11751.14,4950.59 h39.37 r180
R4: F.Fab "R2" at 7453.68,5241.58 h28.35
R5: F.Fab "R3" at 7453.68,4941.58 h28.35
R6: F.Fab "R4" at 7453.01,5041.58 h28.35
R7: F.Fab "R5" at 7453.68,5141.58 h28.35
R11: F.Fab "R9" at 12370.64,6473.42 h28.35 r180
SW1: F.Fab "SW2" at 12288.72,5398 h39.37
Y1: F.Fab "%R" at 10875.59,6538.26 h39.37 r90
ZD1: F.Fab "K" at 11685.97,6865.28 h39.37; F.Fab "%R" at 11834.27,6799.53 h31.5; Cmts.User "K" at 11685.97,6865.28 h39.37
ZD2: F.Fab "%R" at 11769.27,6699.53 h31.5; F.Fab "K" at 11620.97,6765.28 h39.37; Cmts.User "K" at 11620.97,6765.28 h39.37